# Altium PCB PCB1V1.2.PcbDoc (part 2 of 3)
Units mm, origin at the board's own origin, x right, y up, seen from the top; angles counter-clockwise.
Board outline 74.8 x 89.66 mm, 2 copper layers (Top Layer, Bottom Layer); 292 components, 184 nets, 916 pads, 196 vias.
Unrouted connection lines stored in the file: 106.
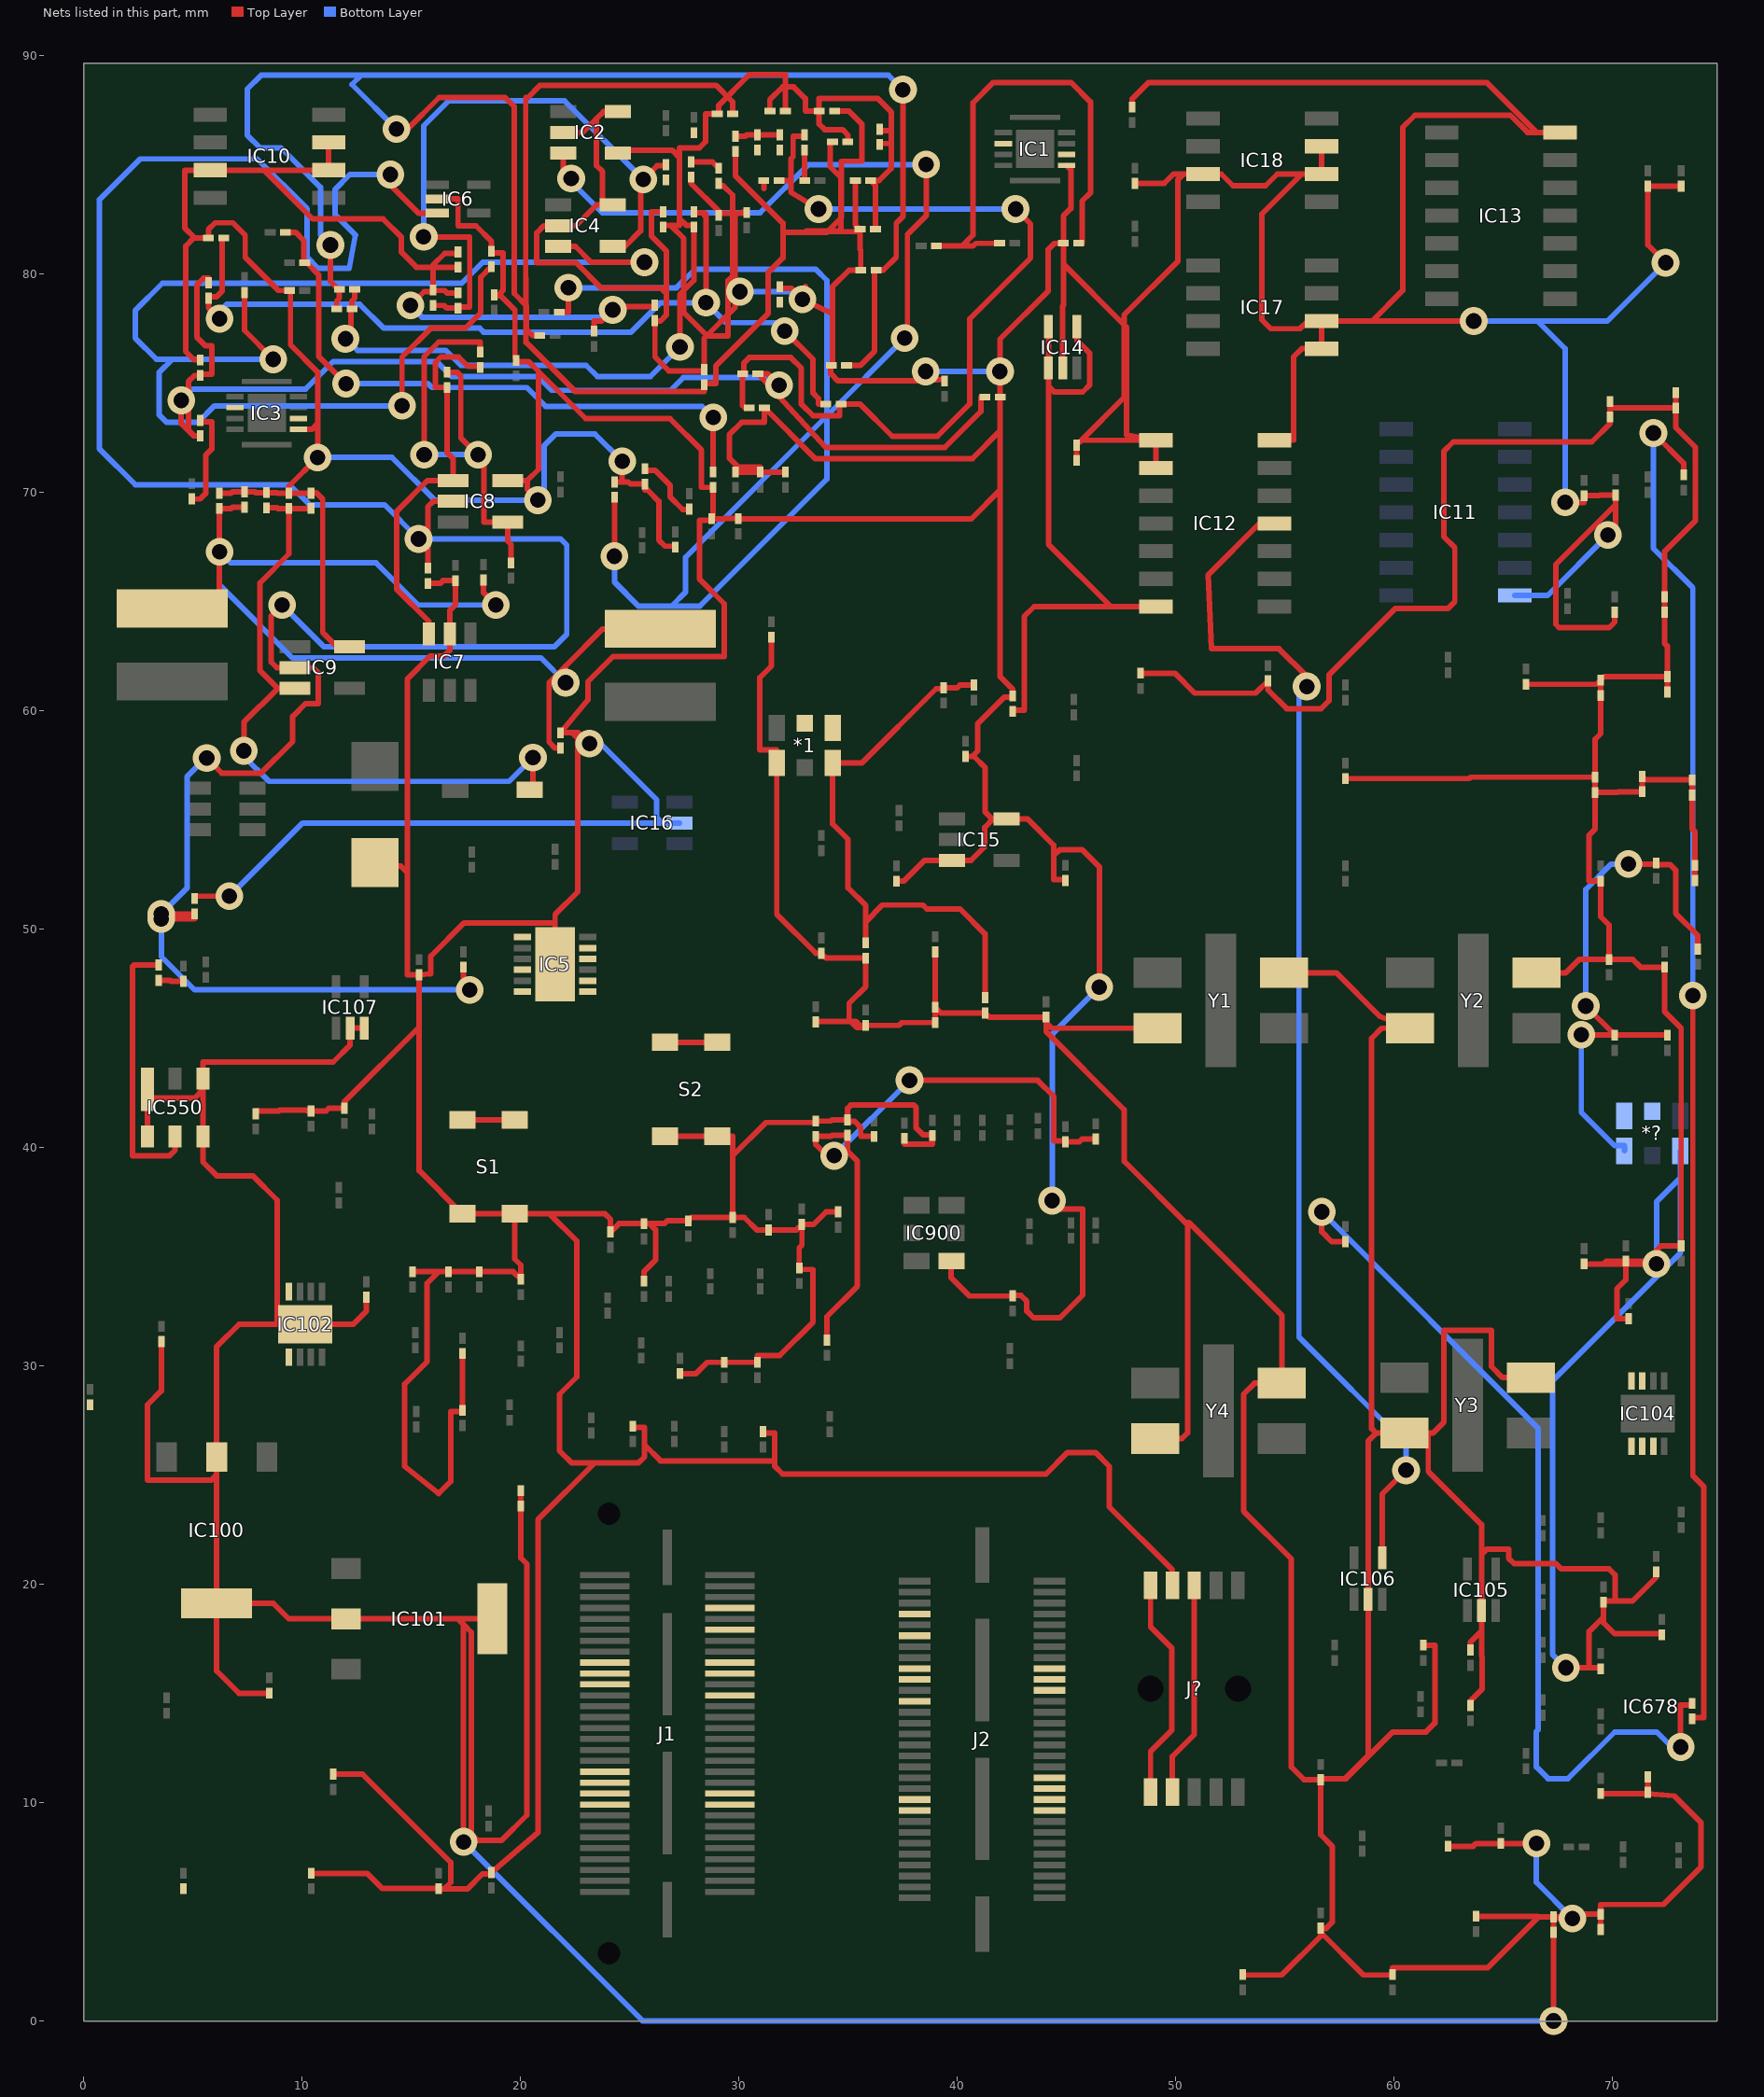
[diagram p2: the nets of this part, all layers, seen from the top]

## Via types
v1: diameter 1.27, hole 0.711, Top Layer to Bottom Layer, 196 vias

## Nets (pads, with @x,y where several pads share a name; then routed paths per layer and width w, separated by ;. In a path a pad name is that pad's centre, name@x,y a point inside that pad or via, vN(x,y) a via of type N, cw(c..) or ccw(c..) an arc to the next point about the centre after c; other vN are vias at no path point) (continued)
3.0V_2: *1.3 *?.3 C101.2 C102.1 C103.1 C104.1 C105.1 C106.1 C107.1 C108.1 C109.1 C109.2 C110.1 C112.1 C112.2 C113.1 C117.1 C118.1 C118.2 C119.1 C119.2 C120.1 C122.1 C123.1 C124.1 C125.1 C126.1 C126.2 C127.1 C127.2 C128.1 C128.2 C131.1 C131.2 C132.1 C134.1 C135.2 C136.1 C137.2 C138.2 C212.2 IC100.2 IC100.4 IC101.2 IC101.4 IC102.9 IC104.2 IC104.3 IC104.7 IC105.2 IC106.2 IC107.2 IC107.3 IC550.1 IC550.3 IC550.4 IC550.6 IC678.3 L100.1 L101.1 L101.2 L102.1 L103.1 L103.2 L104.1 L104.2 L109.1 L110.2 L111.1 L113.1 R104.1 R107.1 R107.2 R111.1 R112.1 R114.1 R115.1 R116.1 R116.2 R117.2 R118.1 R118.2 R119.2 R123.2 Y1.1 Y1.4 Y2.1 Y2.4 Y3.1 Y3.4 Y4.1 Y4.4 | length 580.3
  Top Layer w0.254: IC550.6@2.921,40.513 2.921,41.58 ; 2.922,41.581 IC550.1@2.922,42.266 ; IC550.1@2.922,42.663 IC550.1@2.922,42.266 ; C106.1@3.556,31.115 3.556,28.854 2.921,28.219 2.921,24.765 5.842,24.765 6.096,25.019 ; C108.1@8.509,15.017 8.509,15.011 7.112,15.011 6.096,16.027 IC100.4@6.096,19.129 ; IC107.3@12.857,45.466 IC107.2@12.207,45.466 12.207,44.694 11.43,43.917 5.461,43.917 IC550.3@5.461,43.163 5.461,42.647 ; C120.1@12.954,33.147 12.954,32.512 12.343,31.901 IC102.9@10.156,31.901 8.865,31.901 ; v1(17.399,8.204) 17.399,18.161 ; IC101.4@18.717,18.415 17.145,18.415 ; R107.2@20.018,24.282 R107.1@20.018,23.582 20.018,21.206 20.295,20.93 20.295,9.423 19.152,8.28 18.034,8.28 17.755,8.56 17.755,17.805 17.399,18.161 ; C105.1@31.496,63.373 31.496,62.052 30.963,61.519 30.963,58.217 31.739,58.217 *1.3@31.739,57.614 31.739,50.684 33.528,48.895 C102.1@33.782,48.895 34.005,48.672 C104.1@35.814,48.672 35.814,47.371 35.052,46.609 35.052,45.847 35.13,45.769 ; L100.1@33.528,45.751 33.528,45.769 35.13,45.769 ; C103.1@38.989,48.957 C112.2@38.989,46.42 ; C101.2@48.387,61.722 49.962,61.722 50.876,60.808 53.665,60.808 C107.1@54.229,61.372 54.229,60.96 55.093,60.096 56.667,60.096 57.023,60.452 57.023,61.646 60.071,64.694 62.484,64.694 62.789,64.999 62.789,67.468 62.281,67.976 62.281,71.882 62.713,72.314 69.06,72.314 69.898,73.152 L101.1@69.898,73.46 69.898,73.866 ; Y4.1@49.064,26.67 50.292,26.67 50.546,26.924 50.546,36.474 ; Y1.1@49.17,45.465 44.324,45.465 44.069,45.72 ; R117.2@53.082,2.128 53.082,2.108 54.864,2.108 56.642,3.886 C136.1@56.642,4.064 ; Y1.4@54.97,48.005 57.355,48.005 59.361,46 Y2.1@60.727,45.465 59.436,45.465 58.979,45.008 58.979,27.126 59.182,26.923 ; C136.1@56.642,4.253 C136.1@56.642,4.242 ; C110.1@57.785,56.896 63.449,56.895 63.515,56.961 C128.2@69.215,56.961 ; C138.2@61.341,17.21 61.874,17.21 61.874,13.64 61.468,13.233 59.944,13.233 57.81,11.1 57.76,11.1 ; C122.1@62.484,8.001 63.627,8.001 63.754,8.128 C125.1@64.897,8.128 v1(66.523,8.128) ; C137.2@63.5,14.447 63.5,14.656 64.033,15.189 64.033,16.688 64.008,16.713 64.008,17.856 ; R123.2@63.5,16.987 63.5,17.348 64.008,17.856 ; R119.2@63.754,4.795 66.582,4.795 66.613,4.764 ; C117.1@66.04,61.214 69.277,61.214 C127.2@69.469,61.406 ; Y3.4@66.273,29.463 64.974,29.463 64.465,29.972 64.465,31.624 62.292,31.624 62.292,27.432 61.783,26.923 Y3.1@61.571,26.923 ; Y2.4@66.527,48.005 67.869,48.005 68.474,48.61 C212.2@69.85,48.61 ; v1(67.31,0) R118.1@67.31,4.064 R118.2@67.31,4.699 ; v1(67.869,16.18) 68.936,16.18 ; v1(68.174,4.699) R118.2@67.31,4.699 ; C123.1@68.707,34.671 69.596,34.671 ; R116.1@69.469,4.191 R116.2@69.469,4.891 ; R114.1@69.469,16.129 69.469,16.18 68.936,16.18 ; L101.2@69.898,74.16 69.898,73.866 ; R111.1@70.739,32.162 70.739,32.156 70.206,32.156 70.206,33.528 70.612,33.934 L109.1@70.612,34.671 ; C119.2@71.374,56.992 C119.2@71.453,56.913 ; C131.2@71.628,11.176 C131.1@71.628,10.476 C131.1@71.628,10.409 ; R112.1@72.009,20.574 72.009,20.32 70.917,19.228 70.129,19.228 ; v1(72.023,34.671) L109.1@70.612,34.671 ; L113.1@72.263,17.684 72.263,17.729 70.104,17.729 69.596,18.237 69.596,18.503 ; C126.1@72.517,60.864 C126.2@72.517,61.564 ; C109.2@72.898,74.566 C109.1@72.898,73.866 ; C118.1@73.787,52.228 C118.2@73.787,52.928 73.787,54.458 73.66,54.585 L103.1@73.66,56.134 L103.2@73.66,56.834 71.532,56.834 C119.2@71.453,56.913 ; IC550.1@2.922,42.266 5.08,42.266 5.461,42.647 ; 5.461,42.647 IC550.4@5.461,40.513 5.461,39.345 6.096,38.71 7.747,38.71 8.865,37.592 8.865,31.901 ; IC100.4@6.096,19.129 6.096,25.019 ; IC100.4@6.096,19.129 8.687,19.129 9.401,18.415 IC101.2@12.017,18.415 17.145,18.415 ; 6.096,25.019 IC100.2@6.096,25.829 6.096,30.885 7.112,31.901 8.865,31.901 ; 17.145,18.415 17.399,18.161 ; 35.13,45.769 35.365,45.769 35.542,45.593 L102.1@35.814,45.593 ; 35.13,45.769 35.41,45.489 35.814,45.489 L102.1@35.814,45.593 ; L102.1@35.814,45.593 37.338,45.593 37.465,45.72 C112.1@38.989,45.72 C112.2@38.989,46.42 ; C112.2@38.989,46.42 39.246,46.163 R104.1@41.275,46.163 41.464,45.974 L111.1@44.069,45.974 44.069,45.72 ; 44.069,45.72 44.069,45.314 47.65,41.732 47.65,39.37 50.546,36.474 ; 50.546,36.474 50.546,36.576 50.606,36.576 54.864,32.318 Y4.4@54.864,29.21 53.619,29.21 53.111,28.702 53.111,23.35 55.296,21.165 55.296,11.633 55.88,11.049 C134.1@56.642,11.049 ; C136.1@56.642,4.064 C136.1@56.642,4.242 ; C136.1@56.642,4.064 58.598,2.108 59.94,2.108 C135.2@59.94,2.128 59.94,2.434 64.283,2.434 66.613,4.764 ; C136.1@56.642,4.242 56.896,4.242 57.175,4.521 57.175,8.001 56.642,8.534 C134.1@56.642,11.049 ; C134.1@56.642,11.049 56.642,11.1 57.76,11.1 ; 57.76,11.1 58.816,12.156 IC106.2@58.816,19.304 58.816,26.557 59.182,26.923 ; 59.182,26.923 Y3.1@60.473,26.923 Y3.1@61.571,26.923 ; Y3.1@61.571,26.923 61.571,25.17 64.008,22.733 64.008,21.361 ; 64.008,17.856 IC105.2@64.008,18.796 64.008,21.361 ; 64.008,21.361 64.262,21.615 65.253,21.615 65.253,21.195 65.507,20.941 67.425,20.941 67.666,20.701 69.85,20.701 70.129,20.422 70.129,19.228 ; 66.613,4.764 R118.2@67.31,4.764 ; R118.2@67.31,4.699 R118.2@67.31,4.764 ; R118.2@67.31,4.764 68.326,4.764 68.453,4.891 R116.2@69.469,4.891 ; 68.936,16.18 68.936,17.842 69.596,18.503 ; C128.1@69.215,56.261 69.215,54.585 68.936,54.305 68.936,52.197 C124.1@69.469,52.197 69.469,50.571 69.85,50.19 C212.2@69.85,48.61 ; C128.1@69.215,56.261 C128.2@69.215,56.961 ; C128.1@69.215,56.261 70.256,56.261 70.287,56.292 C119.1@71.374,56.292 71.374,56.834 C119.2@71.453,56.913 ; C128.2@69.215,56.961 69.215,58.699 69.469,58.953 C127.1@69.469,60.706 C127.2@69.469,61.406 ; R116.2@69.469,4.891 69.469,5.334 72.339,5.334 74.064,7.059 74.064,9.078 72.83,10.312 C131.1@71.628,10.409 ; C127.2@69.469,61.406 69.627,61.564 C126.2@72.517,61.564 ; 69.596,18.503 C132.1@69.596,19.177 69.596,19.228 70.129,19.228 ; 69.596,34.671 L109.1@70.612,34.671 ; 69.596,34.671 69.723,34.798 L109.1@70.612,34.798 ; C212.2@69.85,48.61 70.942,48.61 71.292,48.26 C113.1@72.39,48.26 72.39,46.232 73.152,45.47 L110.2@73.152,35.498 72.226,35.498 71.526,34.798 L109.1@70.612,34.798 ; 69.898,73.866 C109.1@72.898,73.866 ; L109.1@70.612,34.671 L109.1@70.612,34.798 ; C131.1@71.628,10.409 R115.1@69.469,10.414 69.469,10.409 C131.1@71.628,10.409 ; C126.2@72.517,61.564 72.517,62.967 72.39,63.094 L104.1@72.39,64.516 L104.2@72.39,65.216 72.39,67.285 73.812,68.707 73.812,72.06 72.898,72.974 C109.1@72.898,73.866
  Bottom Layer w0.254: v1(17.399,8.204) 25.603,0 v1(67.31,0) ; v1(66.523,8.128) 66.523,6.35 v1(68.174,4.699) ; v1(67.869,16.18) 67.259,16.789 67.259,29.312 73.115,35.168 73.115,38.608 ; v1(72.023,34.671) 72.023,37.516 73.115,38.608 ; *?.3@73.115,39.846 73.115,38.608
3.0V_3: C211.1 C213.1 L202.2 R206.1 R208.1 | length 28.9
  Top Layer w0.254: L202.2@34.036,31.18 34.036,32.258 35.433,33.655 35.433,39.37 34.986,39.817 C211.1@34.986,40.563 34.264,40.563 34.214,40.513 C213.1@33.528,40.513 33.528,40.132 34.036,39.624 v1(34.366,39.624) ; v1(37.821,43.078) 43.688,43.078 44.425,42.342 44.425,40.31 44.958,40.31 R208.1@44.958,40.259 45.593,40.259 45.72,40.386 R206.1@46.355,40.386
  Bottom Layer w0.254: v1(34.366,39.624) v1(37.821,43.078)
3.0V_log: C59.1 IC12.14 IC14.1 IC14.4 IC14.5 | length 30.2
  Top Layer w0.254: C59.1@42.545,59.975 42.545,60.02 43.078,60.02 43.078,64.327 43.521,64.77 47.041,64.77 ; IC14.5@44.181,77.592 IC14.1@44.181,75.692 44.181,74.869 ; IC14.4@45.481,77.592 45.481,76.962 46.076,76.367 46.076,74.93 45.745,74.6 44.45,74.6 44.181,74.869 ; IC12.14@49.104,64.77 47.041,64.77 ; 44.181,74.869 44.181,67.63 47.041,64.77
-Z_CIC: J1.24 J2.24 J?.4 J?.5 | length 9.9
  Top Layer w0.254: J?.4@49.857,10.488 49.857,12.116 50.857,13.116 J?.5@50.857,19.948
-Z_DEPLOY_SW_1: J1.17 J2.17 S1.1 S1.2 | length 2.4
  Top Layer w0.254: S1.1@17.342,41.266 S1.2@19.742,41.266
-Z_DEPLOY_SW_2: J1.18 J2.18 S2.1 S2.2 | length 2.4
  Top Layer w0.254: S2.1@26.613,44.822 S2.2@29.013,44.822
-Z_THERMISTOR: J1.22 J2.22 J?.1 J?.2 | length 10.3
  Top Layer w0.254: J?.2@48.857,10.488 48.857,12.344 49.835,13.322 49.835,17.069 48.857,18.047 J?.1@48.857,19.948
CMD_H/W_Bit_0: J1.40 J2.40
CMD_H/W_Bit_1: J1.41 J2.41
CMD_H/W_Bit_2: J1.42 J2.42
CMD_H/W_Bit_3: J1.43 J2.43 R30.1
CMD_H/W_BITS_STROBE: J1.44 J2.44
CMD_SERIAL_DATA: J1.49 J2.49
GND: C1.1 C2.1 C3.1 C4.1 C6.1 C8.1 C9.1 C14.2 C15.1 C16.1 C18.2 C19.2 C20.2 C21.2 C23.2 C27.2 C28.1 C29.1 C30.2 C34.2 C36.2 C37.2 C38.2 C39.2 C40.2 C41.2 C42.2 C43.1 C44.2 C45.2 C46.2 C47.2 C48.2 C49.2 C50.1 C52.2 C53.2 C54.1 C55.1 C56.1 C57.2 C58.1 C59.2 C60.2 C61.1 C62.1 C63.2 C64.2 C65.2 C66.2 C67.1 C68.2 C69.1 C201.1 C203.2 C204.1 C205.2 C206.2 C207.2 C208.2 C209.2 C210.2 C211.2 C213.2 C214.2 C651.1 D6.1 IC1.2 IC1.9 IC1.10 IC2.2 IC2.5 IC3.2 IC3.9 IC3.10 IC4.2 IC4.5 IC5.6 IC5.8 IC5.11 IC5.13 IC6.2 IC7.2 IC8.5 IC9.5 IC10.3 IC10.6 IC10.7 IC11.7 IC12.7 IC12.8 IC12.9 IC13.7 IC14.2 IC15.3 IC15.5 IC16.2 IC17.5 IC17.6 IC18.3 IC18.6 IC18.7 IC900.3 J?.3 L3.1 L7.1 L12.2 L14.1 R4.2 R9.2 R10.1 R12.1 R12.2 R19.2 R23.2 R24.1 R28.1 R29.1 R32.1 R33.1 R36.2 R40.2 R42.1 R201.1 R202.2 R205.1 R212.2 R221.1 R223.1 R653.2 S1.3 S1.4 S2.3 S2.4 | length 735.3
  Top Layer w0.254: C34.2@5.08,51.404 5.08,51.511 v1(6.68,51.511) ; C23.2@5.334,76.059 5.334,76.073 5.055,76.073 4.674,76.454 4.674,81.28 5.055,81.661 5.08,81.661 ; C38.2@6.223,69.963 6.756,69.963 6.818,70.025 C39.2@7.366,70.025 7.849,70.025 7.88,69.994 C44.2@8.382,69.994 8.865,69.994 8.896,69.963 C45.2@9.398,69.963 ; R19.2@7.878,41.546 7.878,41.673 8.939,41.673 8.98,41.714 10.204,41.714 10.245,41.673 C36.2@10.414,41.673 11.1,41.673 11.227,41.8 C37.2@11.938,41.8 11.938,42.088 15.367,45.517 ; IC3.9@9.836,72.884 10.451,72.884 10.719,73.152 ; C53.2@10.418,6.762 12.979,6.762 13.679,6.062 R29.1@16.26,6.062 16.26,6.045 16.51,6.045 ; IC10.7@11.221,86.027 IC10.6@11.221,84.757 8.258,84.757 ; C60.2@11.43,11.303 12.776,11.303 16.815,7.264 16.815,6.35 16.51,6.045 ; IC9.5@12.172,62.926 11.608,62.926 10.947,63.586 10.947,69.698 10.668,69.977 10.414,69.977 R23.2@10.414,69.963 C45.2@9.398,69.963 ; D6.1@13.335,53.045 13.335,52.883 14.529,52.883 14.834,52.578 ; C214.2@15.065,34.315 16.256,34.315 ; C43.1@15.761,65.834 16.332,65.834 16.459,65.961 R24.1@17.031,65.961 17.031,64.859 16.764,64.592 IC7.2@16.764,63.53 16.764,62.763 16.51,62.509 15.875,62.509 14.834,61.468 14.834,52.578 ; IC6.2@16.195,83.439 17.145,83.439 17.145,82.208 17.97,82.208 18.669,81.509 C30.2@18.669,81.043 18.669,80.975 19.202,80.975 19.202,79.248 18.948,78.994 ; C28.1@17.145,80.312 17.145,80.315 15.24,80.315 14.554,81.001 14.554,81.686 13.716,82.525 10.49,82.525 8.258,84.757 ; R223.1@17.351,30.567 C208.2@17.351,27.965 17.351,27.915 16.815,27.915 16.815,24.714 16.256,24.155 14.707,25.4 14.707,29.174 15.723,30.19 15.723,33.782 16.256,34.315 ; R653.2@18.796,79.042 18.796,78.994 18.948,78.994 ; IC8.5@19.424,70.546 20.32,70.546 ; v1(20.803,69.647) 20.32,70.129 20.32,70.546 ; IC5.13@21.59,48.387 21.59,50.292 ; C41.2@21.844,58.993 C41.2@21.844,59.004 ; IC2.2@21.971,86.487 22.855,86.487 23.49,87.122 ; v1(23.165,58.496) 22.657,59.004 22.352,59.004 ; IC4.5@24.237,83.167 IC4.5@23.764,83.167 ; C18.2@24.305,70.479 24.663,70.479 ; IC2.5@24.471,87.437 23.805,87.437 23.49,87.122 ; v1(24.663,71.425) 24.663,70.479 ; C207.2@25.146,27.243 25.146,27.178 25.679,27.178 25.679,26.391 ; C210.2@25.654,33.878 25.654,34.315 26.187,34.849 26.187,36.235 25.908,36.514 ; C29.1@26.162,77.874 C29.1@26.162,77.851 ; C20.2@26.543,82.852 26.01,82.852 26.01,81.734 26.695,81.048 26.695,79.096 ; S2.3@26.613,40.522 S2.4@29.013,40.522 29.718,40.522 29.718,39.624 ; R28.1@27.099,67.493 27.099,67.539 26.619,67.539 26.34,67.818 26.34,69.596 25.832,70.104 25.702,70.104 C50.1@25.702,70.383 25.039,70.383 24.943,70.479 24.663,70.479 ; C204.1@27.305,29.648 28.042,29.648 28.558,30.164 C205.2@29.337,30.164 C206.2@30.861,30.164 30.861,30.48 31.877,30.48 33.401,32.004 33.401,34.417 32.766,34.417 C66.2@32.766,34.482 32.766,35.408 32.893,35.535 C67.1@32.893,36.48 ; L14.1@27.813,84.438 27.813,84.15 29.083,82.88 C48.2@29.083,82.779 ; C48.2@29.083,82.694 C48.2@29.083,82.779 ; C47.2@29.845,70.931 C46.2@30.988,70.931 ; v1(30.048,79.197) v1@29.82,79.426 ; C49.2@30.353,82.821 30.141,82.821 30.099,82.779 29.82,82.779 ; C16.1@30.861,85.702 C16.1@30.884,85.725 ; R212.2@31.115,26.989 31.115,26.924 31.648,26.924 31.648,25.654 ; 31.146,83.923 C9.1@31.146,84.28 ; R10.1@31.854,85.725 31.877,85.702 R10.1@31.877,85.677 ; C27.2@31.873,79.418 31.873,79.35 32.41,79.35 v1(32.918,78.842) ; C14.2@32.131,70.931 C46.2@30.988,70.931 ; v1@33.045,79.426 32.918,79.299 v1(32.918,78.842) ; C6.1@34.29,86.058 34.188,86.058 34.188,84.912 34.671,84.43 34.671,81.963 33.106,81.963 33.129,81.94 34.671,81.94 L3.1@35.509,81.94 ; R40.2@34.544,37.053 33.999,37.053 33.426,36.48 C67.1@32.893,36.48 ; C4.1@35.337,84.28 35.337,82.247 35.516,82.068 L3.1@35.556,82.068 35.556,81.94 35.556,81.133 35.587,81.102 C2.1@35.587,80.18 35.052,80.18 34.29,79.418 34.29,78.181 ; C201.1@36.195,40.513 35.585,40.513 35.585,40.919 35.306,41.199 34.986,41.199 C211.2@34.986,41.263 ; C58.1@37.211,52.197 37.557,52.197 38.512,53.152 IC15.3@39.771,53.152 40.64,53.152 41.26,53.772 41.26,54.656 41.656,55.052 ; R202.2@37.592,40.417 37.592,40.157 38.862,40.157 R201.1@38.862,40.544 38.862,40.589 38.43,40.589 38.125,40.894 38.125,41.834 38.019,41.941 35.133,41.941 34.986,41.793 C211.2@34.986,41.263 ; v1(38.557,75.54) v1@38.557,75.108 ; L12.2@39.418,75.097 39.418,75.184 39.41,75.183 38.595,75.111 v1@38.557,75.108 ; IC900.3@39.74,34.794 39.726,34.794 39.726,34.036 40.564,33.198 42.545,33.198 C203.2@42.545,33.212 42.545,33.223 42.926,33.223 43.192,32.958 43.192,32.512 43.496,32.207 44.704,32.207 45.745,33.249 45.745,37.176 44.739,37.176 v1(44.348,37.567) ; C61.1@40.386,57.912 40.692,57.912 ; R9.2@41.973,74.366 R9.2@41.961,74.366 ; IC14.2@44.831,75.692 44.831,78.537 44.862,78.568 44.862,80.462 ; R205.1@44.958,52.228 44.958,52.273 44.425,52.273 44.425,53.365 ; IC1.9@45.011,84.975 45.203,84.783 45.203,83.007 44.862,82.666 C1.1@44.862,81.407 ; R12.1@45.462,71.465 R12.2@45.462,72.165 45.687,72.39 ; v1(46.507,47.346) 46.507,52.857 45.72,53.645 44.704,53.645 44.425,53.365 ; C68.2@48.006,87.647 48.006,88.011 48.768,88.773 64.237,88.773 66.523,86.487 ; R42.1@48.133,84.153 49.479,84.153 49.908,84.582 50.368,84.582 ; IC12.9@49.104,71.12 IC12.8@49.104,72.39 ; J?.3@49.857,19.948 49.857,20.653 46.965,23.546 46.965,25.4 46.33,26.035 45.06,26.035 44.069,25.044 32.004,25.044 31.648,25.4 31.648,25.654 ; IC12.7@54.528,72.39 55.397,72.39 55.397,76.2 55.778,76.581 IC17.5@56.687,76.581 IC17.6@56.687,77.851 ; IC18.7@56.687,85.852 IC18.6@56.687,84.582 55.778,84.582 ; v1(63.652,77.851) 59.004,77.851 ; IC13.7@67.609,86.487 66.523,86.487 ; v1(67.843,69.545) 68.707,69.545 C54.1@68.707,69.85 69.393,69.85 69.424,69.881 C55.1@70.152,69.881 70.152,69.444 ; v1(69.799,68.047) 70.152,68.399 70.152,69.444 ; R32.1@70.104,64.516 70.104,64.059 69.85,63.805 67.564,63.805 67.412,63.957 67.412,66.703 70.152,69.444 ; v1(72.441,80.518) 71.628,81.331 C56.1@71.628,84.026 R33.1@73.152,84.026 ; 5.08,81.661 4.625,82.116 4.625,84.757 IC10.3@5.797,84.757 8.258,84.757 ; 5.08,81.661 C8.1@5.715,81.661 5.715,82.042 6.02,82.347 6.833,82.347 7.401,81.778 7.401,80.762 8.915,79.248 L7.1@9.429,79.248 9.474,79.248 9.474,76.759 10.719,75.514 10.719,73.152 ; C45.2@9.398,69.963 9.398,70.282 v1(10.719,71.603) 10.719,73.152 ; 14.834,52.578 14.834,47.904 C651.1@15.367,47.904 ; 15.367,45.517 C651.1@15.367,47.904 ; 15.367,45.517 15.367,38.941 S1.3@17.342,36.966 S1.4@19.742,36.966 ; C651.1@15.367,47.904 C651.1@15.367,47.91 15.9,47.955 15.9,48.768 17.424,50.292 21.59,50.292 ; 16.256,34.315 R36.2@16.716,34.315 C57.2@18.113,34.315 19.668,34.315 R221.1@20.018,33.965 20.018,34.62 19.742,34.896 S1.4@19.742,36.966 ; 16.51,6.045 17.577,6.045 18.263,6.731 18.669,6.731 C52.2@18.669,6.796 20.803,8.636 20.803,22.962 23.393,25.552 ; 18.948,78.994 19.115,78.994 19.751,78.358 19.751,76.19 19.812,76.19 C19.2@19.812,76.042 19.812,75.997 20.371,75.997 20.828,75.54 ; S1.4@19.742,36.966 21.336,36.966 ; 20.32,70.546 20.828,71.054 20.828,75.54 ; 20.828,75.54 22.987,73.381 26.848,73.381 28.296,71.933 28.296,70.231 C15.1@28.829,70.231 28.829,68.88 28.75,68.801 C42.2@28.75,68.797 ; 21.336,36.966 23.876,36.966 24.13,36.712 C209.2@24.13,36.133 24.511,36.514 C65.2@25.654,36.514 25.908,36.514 ; 21.336,36.966 22.581,35.721 22.581,29.489 21.793,28.702 21.793,26.111 22.352,25.552 23.393,25.552 ; 21.59,50.292 21.59,50.673 22.631,51.714 22.631,58.725 22.352,59.004 ; C41.2@21.844,59.004 22.352,59.004 ; C41.2@21.844,59.004 23.089,60.503 23.089,61.328 24.245,62.484 29.337,62.484 29.337,64.897 28.194,66.04 28.194,68.732 28.75,68.732 C42.2@28.75,68.797 ; 23.393,25.552 25.4,25.552 25.679,25.832 25.679,26.391 ; 23.49,87.122 23.49,84.965 23.764,84.691 IC4.5@23.764,83.167 ; IC4.5@23.764,83.167 23.49,83.167 22.54,82.217 IC4.2@21.737,82.217 21.082,82.217 20.752,81.887 20.752,80.524 22.542,80.524 23.691,79.375 26.416,79.375 26.695,79.096 ; 25.679,26.391 26.416,25.654 31.648,25.654 ; 25.908,36.514 26.594,36.514 26.721,36.641 C64.2@27.686,36.641 27.844,36.799 C63.2@29.718,36.799 ; C29.1@26.162,77.851 26.162,76.2 26.797,75.565 28.417,75.565 C21.2@28.417,75.63 28.417,77.058 29.82,78.461 v1@29.82,79.426 ; C29.1@26.162,77.851 26.416,77.851 26.695,78.13 26.695,79.096 ; C42.2@28.75,68.797 29.337,68.797 29.343,68.803 C40.2@29.972,68.803 29.972,68.783 40.64,68.783 41.961,70.104 ; C48.2@29.083,82.779 29.82,82.779 ; C63.2@29.718,36.799 29.718,39.624 ; C63.2@29.718,36.799 30.251,36.799 30.824,36.226 C69.1@31.369,36.226 32.639,36.226 C67.1@32.893,36.48 ; 29.718,39.624 31.242,41.148 33.528,41.148 C213.2@33.528,41.213 34.214,41.213 34.264,41.263 C211.2@34.986,41.263 ; v1@29.82,79.426 29.82,82.779 ; C46.2@30.988,70.931 30.988,71.171 29.972,71.171 29.566,71.577 29.566,72.644 30.124,73.203 31.174,73.203 R4.2@31.174,73.878 33.498,71.554 40.702,71.554 41.961,72.813 ; v1(32.918,78.842) 34.29,78.181 ; 34.29,78.181 34.29,75.814 C3.1@34.238,75.814 34.214,75.814 34.214,75.438 34.544,75.108 v1@38.557,75.108 ; 40.692,57.912 40.767,57.912 41.275,57.404 41.275,55.372 41.595,55.052 41.656,55.052 ; 40.692,57.912 40.946,58.166 40.946,59.412 42.164,60.63 42.545,60.63 C59.2@42.545,60.675 42.545,60.985 41.961,61.57 41.961,70.104 ; 41.656,55.052 IC15.5@42.271,55.052 43.221,55.052 44.425,53.848 44.425,53.365 ; 41.961,70.104 41.961,72.813 ; 41.961,72.813 R9.2@41.961,74.366 ; R9.2@41.961,74.366 v1(41.961,75.54) 41.961,77.013 44.171,79.223 44.171,81.128 44.45,81.407 C1.1@44.862,81.407 ; 44.862,80.462 C1.1@44.862,81.407 ; 44.862,80.462 47.65,77.673 ; 45.687,72.39 47.65,74.353 47.65,77.673 ; 45.687,72.39 IC12.8@49.104,72.39 ; 47.65,77.673 47.752,77.572 47.752,72.644 IC12.8@49.104,72.39 ; 47.65,77.673 47.65,78.13 50.114,80.594 50.114,84.328 50.368,84.582 ; 50.368,84.582 IC18.3@51.263,84.582 52.095,84.582 52.629,84.049 54.124,84.049 54.657,84.582 55.778,84.582 ; 55.778,84.582 53.95,82.753 53.95,77.902 54.356,77.495 55.696,77.495 56.052,77.851 IC17.6@56.687,77.851 ; IC17.6@56.687,77.851 59.004,77.851 ; 59.004,77.851 60.401,79.248 60.401,86.716 60.96,87.274 65.329,87.274 66.116,86.487 66.523,86.487
  Bottom Layer w0.254: v1(6.68,51.511) 10.033,54.864 26.492,54.864 ; v1(10.719,71.603) 14.122,71.603 16.078,69.647 v1(20.803,69.647) 21.082,69.926 21.082,72.136 21.615,72.669 23.419,72.669 v1(24.663,71.425) ; v1(23.165,58.496) 23.673,58.496 26.238,55.931 26.238,55.118 26.492,54.864 ; IC16.2@27.285,54.864 26.492,54.864 ; v1(30.048,79.197) 32.563,79.197 v1(32.918,78.842) ; v1(38.557,75.54) v1(41.961,75.54) ; v1(44.348,37.567) 44.348,45.187 v1(46.507,47.346) ; v1(63.652,77.851) 66.573,77.851 ; IC11.7@65.532,65.278 67.031,65.278 v1(69.799,68.047) ; v1(67.843,69.545) 67.843,76.581 66.573,77.851 ; v1(72.441,80.518) 69.774,77.851 66.573,77.851
I2C2_SCL: J1.19 J2.19
I2C2_SDA: J1.20 J2.20
ICR_RSSI: J1.37 J2.37
IF+: IC678.1 R103.2 R105.1 | length 62.9
  Top Layer w0.254: v1(71.882,72.72) 73.279,71.323 R103.2@73.279,70.804 ; R105.1@73.66,13.843 73.66,13.894 74.193,13.894 74.193,24.46 73.685,24.968 v1(73.685,46.965)
  Bottom Layer w0.254: v1(71.882,72.72) 71.882,67.437 73.685,65.634 v1(73.685,46.965)
IF-: IC678.2 R105.2 R106.1 | length 42.3
  Top Layer w0.254: v1(56.693,37.059) 56.693,36.144 57.15,35.687 R106.1@57.785,35.687 ; v1(73.127,12.548) 73.127,14.478 73.66,14.478 R105.2@73.66,14.543
  Bottom Layer w0.254: v1(56.693,37.059) 66.599,27.153 66.599,13.335 66.523,13.259 66.523,11.633 67.056,11.1 67.973,11.1 70.104,13.231 72.034,13.231 72.718,12.548 v1(73.127,12.548)
LT: IC12.4 IC106.4 | length 55.3
  Top Layer w0.254: IC12.4@54.528,68.58 53.848,68.58 51.486,66.218 51.637,62.84 54.736,62.84 56.007,61.57 v1(56.007,61.112) ; IC106.4@59.466,21.204 59.466,24.135 v1(60.554,25.222)
  Bottom Layer w0.254: v1(56.007,61.112) 55.651,60.757 55.651,31.318 60.554,26.416 v1(60.554,25.222)
MODEM_CXR_DET: J1.53 J2.53
Net*1_1: *1.1 C104.2 R100.2 R102.2 R104.2 | length 26.1
  Top Layer w0.254: *1.1@34.3,57.614 *1.1@34.3,57.607 ; C104.2@35.814,49.372 35.814,50.343 ; R100.2@40.767,61.183 40.132,61.183 40.005,61.056 R102.2@39.37,61.056 39.37,61.011 39.04,61.011 35.636,57.607 *1.1@34.3,57.607 ; R104.2@41.275,46.863 41.275,49.784 40.132,50.927 38.608,50.927 38.43,51.105 36.576,51.105 35.814,50.343 ; *1.1@34.3,57.607 34.3,54.813 35.001,54.112 35.001,51.892 35.814,51.079 35.814,50.343
Net*1_4: *1.4 IC102.1
Net*1_5: *1.5 IC102.8
Net*?_1: *?.1 C121.2 R108.2 R109.2 R110.2 | length 26.4
  Top Layer w0.254: v1(68.58,45.161) C121.2@70.104,45.161 ; v1(68.783,46.482) C121.2@70.104,45.161 ; v1(70.739,52.984) R108.2@72.009,52.984 ; R108.2@72.009,53.024 R108.2@72.009,52.984 ; R110.2@72.517,45.15 C121.2@70.104,45.15 C121.2@70.104,45.161 ; R109.2@73.914,49.087 73.914,49.708 72.898,50.724 72.898,52.705 72.644,52.959 72.009,52.959 R108.2@72.009,52.984
  Bottom Layer w0.254: v1(68.58,45.161) 68.58,41.605 70.104,40.081 70.554,40.081 *?.1@70.554,39.846 ; v1(68.783,46.482) 68.783,51.816 69.952,52.984 v1(70.739,52.984)
Net*?_4: *?.4 IC104.1
Net*?_5: *?.5 IC104.8
NetC1_2: C1.2 L1.1 R1.2 | length 22.6
  Top Layer w0.254: R1.2@39.054,81.28 40.216,81.28 ; L1.1@41.941,81.407 40.851,81.407 40.724,81.28 40.216,81.28 ; C1.2@45.562,81.407 45.72,81.407 45.72,83.337 46.101,83.718 46.101,87.884 45.212,88.773 41.656,88.773 40.724,87.841 40.724,81.788 40.216,81.28
NetC2_2: C2.2 C3.2 L4.2 R2.1 R3.1 | length 78.1
  Top Layer w0.254: v1(11.303,81.331) 11.303,79.663 11.67,79.296 R3.1@11.715,79.296 11.715,78.892 11.588,78.765 L4.2@11.588,78.407 ; v1(14.326,86.639) 14.834,86.639 16.281,88.087 19.304,88.087 19.721,87.671 19.721,79.107 20.269,78.558 20.269,77.47 20.554,77.185 R2.1@20.89,77.185 ; C3.2@34.938,75.814 35.56,75.814 36.22,76.474 36.22,80.18 C2.2@36.287,80.18 36.619,80.18 37.211,80.772 37.211,82.321 37.516,82.626 v1(37.516,88.443)
  Bottom Layer w0.254: v1(11.303,81.331) 10.846,81.788 10.846,83.972 9.042,85.776 8.077,85.776 7.493,86.36 7.493,88.468 8.128,89.103 12.7,89.103 ; v1(14.326,86.639) 12.281,88.684 12.7,89.103 ; v1(37.516,88.443) 36.855,89.103 12.7,89.103
NetC4_2: C4.2 C12.2 L3.2 | length 5.8
  Top Layer w0.254: L3.2@36.256,82.068 36.256,84.061 C4.2@36.037,84.28 36.426,84.28 36.982,84.836 36.982,86.563 36.449,86.563 C12.2@36.449,86.631
NetC6_2: C6.2 C12.1 L5.1 R6.1 | length 12.4
  Top Layer w0.254: R6.1@31.431,87.455 31.42,87.455 31.42,87.986 32.004,88.57 32.512,88.57 33.045,88.036 33.045,87.455 L5.1@33.68,87.455 ; L5.1@33.686,87.455 L5.1@33.68,87.455 ; C6.2@34.99,86.058 35.001,86.058 35.001,86.36 34.747,86.614 33.934,86.614 33.68,86.868 L5.1@33.68,87.455 ; C12.1@36.449,85.931 36.449,85.979 36.982,85.979 36.982,87.427 36.373,88.036 33.68,88.036 L5.1@33.68,87.455
NetC8_2: C8.2 C13.2 L6.1 L11.1 | length 41.7
  Top Layer w0.254: v1(6.223,77.953) 5.715,78.461 L11.1@5.715,78.898 5.715,78.967 6.096,78.967 6.35,79.221 6.35,81.661 C8.2@6.415,81.661 ; C13.2@27.94,82.852 27.94,82.804 28.321,82.804 ; v1(28.499,78.689) 28.499,82.626 ; v1(32.106,77.394) 33.401,76.098 33.401,74.549 33.655,74.295 33.655,74.041 L6.1@33.988,74.041 ; 28.321,82.804 28.423,82.804 28.499,82.728 28.499,82.626 ; 28.321,82.804 28.499,82.626
  Bottom Layer w0.254: v1(6.223,77.953) 6.223,78.283 6.553,78.613 12.649,78.613 13.741,77.521 18.136,77.521 18.313,77.343 25.07,77.343 26.416,78.689 v1(28.499,78.689) 29.413,77.775 31.725,77.775 v1(32.106,77.394)
NetC9_2: C9.2 C11.2 L6.2 R4.1 R7.1 | length 41.2
  Top Layer w0.254: R4.1@30.474,73.878 30.281,73.878 30.178,73.981 R7.1@30.178,75.438 30.226,75.438 30.226,75.921 30.48,76.175 32.385,76.175 32.868,75.692 32.868,74.041 33.401,73.508 34.62,73.508 34.62,74.041 L6.2@34.688,74.041 35.56,74.041 37.031,72.57 39.093,72.57 40.575,74.052 40.575,77.952 43.358,80.735 43.358,82.296 v1(42.674,82.979) ; C9.2@31.846,84.28 32.385,84.28 ; C11.2@33.02,86.377 33.02,86.309 32.487,86.309 32.487,85.369 32.385,85.268 32.385,84.28 ; v1(33.655,82.979) 32.385,83.744 32.385,84.28
  Bottom Layer w0.254: v1(33.655,82.979) v1(42.674,82.979)
NetC11_1: C11.1 L2.1 | length 1.4
  Top Layer w0.254: L2.1@33.02,84.28 C11.1@33.02,85.677
NetC13_1: C13.1 IC2.4 L4.1 R3.2 | length 31.5
  Top Layer w0.254: v1(11.989,77.038) 12.243,77.292 12.243,78.407 L4.1@12.288,78.407 12.288,78.765 12.415,78.892 R3.2@12.415,79.296 ; IC2.4@24.471,85.537 24.892,85.537 25.029,85.674 26.949,85.674 27.28,85.344 27.28,82.55 27.61,82.22 27.94,82.22 C13.1@27.94,82.152 27.94,79.705 27.305,79.07 v1(27.305,76.657)
  Bottom Layer w0.254: v1(11.989,77.038) 12.014,77.038 12.548,76.505 16.586,76.505 17.272,75.819 23.012,75.819 23.52,75.311 25.959,75.311 v1(27.305,76.657)
NetC15_2: C15.2 L8.1 R8.2 | length 28.4
  Top Layer w0.254: L8.1@9.24,81.915 9.703,81.915 10.084,81.534 10.084,80.518 R8.2@10.129,80.518 10.211,80.518 10.76,79.969 10.76,76.235 v1(12.014,74.981) ; C15.2@28.829,70.931 v1(28.829,73.431)
  Bottom Layer w0.254: v1(12.014,74.981) 15.773,74.981 15.951,74.803 20.295,74.803 21.158,73.939 28.321,73.939 v1(28.829,73.431)
NetC16_2: C16.2 L10.2 R10.2 | length 2.1
  Top Layer w0.254: L10.2@29.845,86.312 30.302,86.312 30.367,86.377 C16.2@30.861,86.377 R10.2@31.877,86.377
NetC17_1: C17.1 C20.1 L9.1 R6.2 | length 27.4
  Top Layer w0.254: C20.1@26.543,82.152 26.543,82.22 26.891,82.22 ; C17.1@29.083,84.153 29.083,84.049 29.286,84.049 29.718,83.617 29.718,79.908 29.515,79.705 29.515,77.165 28.55,77.165 27.483,78.232 27.483,81.628 26.891,82.22 ; R6.2@32.131,87.455 32.131,89.129 30.48,89.129 29.083,87.732 29.083,87.328 L9.1@29.018,87.328 28.473,87.328 28.473,86.055 28.194,85.776 27.28,85.776 27.28,82.22 26.891,82.22
NetC17_2: C17.2 C27.1 L14.2 | length 1.4
  Top Layer w0.254: L14.2@27.813,85.138 28.798,85.138 C17.2@29.083,84.853
NetC18_1: C18.1 IC2.3 R5.2 | length 86.6
  Top Layer w0.254: R5.2@21.782,78.249 22.2,78.249 v1(22.2,79.375) ; IC2.3@21.971,85.537 21.971,84.734 v1(22.327,84.379) ; v1(24.305,67.081) v1@24.305,67.084 ; C18.1@24.305,69.779 v1@24.305,67.084 ; v1(24.308,67.081) v1@24.305,67.084 ; v1(37.592,77.064) 37.723,77.195 37.723,81.813 38.583,82.673 v1(38.583,85.014)
  Bottom Layer w0.254: v1(22.2,79.375) 27.153,79.375 27.991,80.213 33.528,80.213 34.036,79.705 34.036,73.508 ; v1(22.327,84.379) 22.25,84.303 23.749,82.804 30.976,82.804 33.186,85.014 v1(38.583,85.014) ; v1(24.305,67.081) 24.305,65.89 25.4,64.795 25.425,64.795 ; v1(24.308,67.081) 24.308,65.913 25.425,64.795 ; v1(37.592,77.064) 34.036,73.508 ; 25.425,64.795 26.924,64.795 ; 26.924,64.795 28.219,64.795 34.036,70.612 34.036,73.508 ; 26.924,64.795 27.566,65.438 27.566,67.038 34.036,73.508
NetC21_1: C21.1 L5.2 L9.2 L10.1 | length 54.3
  Top Layer w0.254: L9.2@29.718,87.328 29.718,87.884 28.956,88.646 20.904,88.646 20.345,88.087 20.244,88.087 20.244,79.858 20.259,79.842 20.259,76.871 22.504,74.625 28.417,74.625 C21.1@28.417,74.93 28.417,74.981 28.956,74.981 28.956,75.803 31.339,78.186 31.339,80.056 32.024,80.741 32.024,81.915 ; L10.1@29.845,85.612 29.845,84.506 32.024,82.327 32.024,81.915 ; L5.2@34.386,87.455 35.052,87.455 35.636,86.871 35.636,85.166 34.696,85.166 34.696,82.575 34.036,81.915 32.024,81.915
NetC23_1: C23.1 C25.1 L11.2 R7.2 R9.1 | length 54.9
  Top Layer w0.254: v1(4.47,74.219) 4.47,73.152 5.029,72.593 5.08,72.593 ; C25.1@5.334,72.596 5.334,72.593 5.08,72.593 ; L11.2@5.715,79.598 5.715,79.807 5.486,79.807 5.182,79.502 5.182,77.114 5.588,76.708 5.867,76.708 5.867,75.413 5.334,75.413 C23.1@5.334,75.359 5.334,75.356 5.08,75.356 4.801,75.077 4.801,72.873 5.08,72.593 ; v1(31.852,74.905) 31.318,75.438 R7.2@30.878,75.438 31.59,74.664 33.983,72.062 39.444,72.062 41.083,73.701 41.083,74.366 R9.1@41.273,74.366
  Bottom Layer w0.254: v1(4.47,74.219) 4.978,74.727 10.16,74.727 11.43,75.997 16.167,75.997 16.853,75.311 20.803,75.311 21.438,74.676 26.88,74.676 27.464,75.26 31.496,75.26 v1(31.852,74.905)
NetC25_2: C25.2 L13.1 | length 4.7
  Top Layer w0.254: L13.1@4.953,69.706 4.953,69.698 5.334,69.698 5.588,69.952 5.588,71.704 5.867,71.984 5.867,73.228 5.334,73.228 C25.2@5.334,73.296
NetC28_2: C28.2 C29.2 L16.2 R13.2 R14.1 | length 19
  Top Layer w0.254: v1(14.961,78.562) 15.596,79.197 16.002,79.197 R14.1@16.002,79.248 ; L16.2@17.145,79.138 16.637,79.138 16.527,79.248 R14.1@16.002,79.248 ; C28.2@17.145,81.012 17.145,80.95 16.535,80.95 16.002,80.416 R14.1@16.002,79.265 R14.1@16.002,79.248 ; R13.2@23.368,77.383 23.368,77.851 23.724,77.851 v1@24.13,78.257 ; v1(24.232,78.359) v1@24.13,78.257 ; C29.2@26.162,78.574 26.162,78.511 23.876,78.511 v1@24.13,78.257
  Bottom Layer w0.254: v1(14.961,78.562) 15.494,78.029 23.901,78.029 v1(24.232,78.359)
NetC30_1: C30.1 IC4.3 R15.1 | length 63.4
  Top Layer w0.254: R15.1@7.366,79.152 7.366,77.419 v1(8.687,76.098) ; v1(14.58,73.965) 14.58,76.2 15.9,77.521 17.475,77.521 18.186,78.232 18.186,79.86 C30.1@18.669,80.343 ; IC4.3@21.737,81.267 22.517,81.267 23.241,80.543 v1(25.679,80.543)
  Bottom Layer w0.254: v1(8.687,76.098) 4.064,76.098 ; v1(14.58,73.965) 5.994,73.965 5.232,73.203 3.81,73.203 3.454,73.558 3.454,75.489 4.064,76.098 ; v1(25.679,80.543) 18.276,80.543 17.311,79.578 3.607,79.578 2.362,78.334 2.362,77.074 3.337,76.098 4.064,76.098
NetC31_1: C31.1 L15.1
NetC31_2: C31.2 IC4.4 L16.1 R14.2 | length 29.5
  Top Layer w0.254: v1(15.57,81.7) 17.678,81.7 17.678,78.486 17.145,78.486 L16.1@17.145,78.438 16.637,78.438 16.51,78.565 R14.2@16.002,78.565 ; IC4.4@24.237,81.267 24.79,81.267 25.502,81.978 25.502,84.201 v1(25.629,84.328) 26.264,84.963 26.67,84.963 C31.2@26.67,85.011
  Bottom Layer w0.254: v1(15.57,81.7) 15.57,86.782 16.723,87.935 22.022,87.935 v1(25.629,84.328)
NetC32_1: C32.1 L17.2 | length 1.2
  Top Layer w0.254: C32.1@3.429,47.656 3.962,47.656 4.01,47.608 L17.2@4.572,47.608
NetC32_2: C32.2 IC550.5 | length 12.6
  Top Layer w0.254: C32.2@3.429,48.356 3.429,48.362 2.311,48.362 2.235,48.285 2.235,39.624 3.935,39.624 4.189,39.878 IC550.5@4.189,40.513
NetC34_1: C34.1 C43.2 IC5.1 IC5.4 IC5.7 IC5.10 IC6.3 IC8.2 IC9.2 R17.1 | length 126
  Top Layer w0.254: v1(3.556,50.47) 5.08,50.47 C34.1@5.08,50.698 ; v1(3.556,50.698) C34.1@5.08,50.698 ; C34.1@5.08,50.704 C34.1@5.08,50.698 ; v1(5.639,57.836) 6.325,57.15 8.128,57.15 9.576,58.598 9.576,59.741 10.16,60.325 10.753,60.325 10.753,61.722 10.499,61.976 IC9.2@9.672,61.976 8.845,61.976 8.591,62.23 8.591,64.344 v1(9.093,64.846) ; v1(14.046,84.557) 14.046,84.074 15.331,82.789 IC6.3@16.195,82.789 ; v1(15.342,67.869) v1@15.761,67.449 ; C43.2@15.761,66.534 v1@15.761,67.449 ; IC8.2@16.924,69.596 16.015,69.596 15.761,69.342 v1@15.761,67.449 ; R17.1@17.399,48.26 17.399,47.498 v1(17.678,47.219)
  Bottom Layer w0.254: v1(3.556,50.47) 3.556,48.743 5.08,47.219 v1(17.678,47.219) ; v1(3.556,50.698) 4.75,51.892 4.75,56.998 5.588,57.836 v1(5.639,57.836) ; v1(9.093,64.846) 11.013,62.927 21.55,62.927 22.123,63.5 22.123,67.589 21.844,67.869 v1(15.342,67.869) 13.777,69.434 10.348,69.434 9.433,70.348 2.372,70.348 0.731,71.989 0.731,83.415 2.591,85.275 7.943,85.275 10.236,82.982 10.236,80.772 10.744,80.264 12.167,80.264 12.446,81.788 11.506,82.728 11.506,83.871 12.192,84.557 v1(14.046,84.557)
NetC38_1: C38.1 C39.1 C41.1 L18.2 L19.1 R20.1 | length 52.4
  Top Layer w0.254: L18.2@4.064,64.681 6.223,64.681 v1(6.223,67.285) C38.1@6.223,69.263 6.756,69.263 6.818,69.325 C39.1@7.366,69.325 ; R20.1@18.301,65.992 18.301,65.417 v1(18.872,64.846) ; C41.1@21.844,58.293 21.59,58.293 21.311,58.572 21.311,61.29 22.073,62.052 ; v1(22.073,61.29) 22.073,62.052 ; L19.1@26.416,63.754 23.774,63.754 22.073,62.052
  Bottom Layer w0.254: v1(18.872,64.846) 15.316,64.846 13.386,66.777 6.731,66.777 v1(6.223,67.285) 6.223,65.76 9.565,62.419 20.944,62.419 v1(22.073,61.29)
NetC44_1: C44.1 C45.1 D?.2 IC9.3 R23.1 | length 31.5
  Top Layer w0.254: v1(7.341,58.166) 7.341,59.487 8.89,61.026 ; C44.1@8.382,69.294 8.865,69.294 8.896,69.263 C45.1@9.398,69.263 ; IC9.3@9.672,61.026 8.89,61.026 ; R23.1@10.414,69.263 C45.1@9.398,69.263 ; D?.2@20.418,56.388 20.574,56.388 v1(20.574,57.861) ; 8.89,61.026 8.077,61.839 8.077,65.862 9.398,67.183 C45.1@9.398,69.263
  Bottom Layer w0.254: v1(7.341,58.166) 7.341,57.912 8.484,56.769 19.482,56.769 v1(20.574,57.861)
NetC50_2: C50.2 R26.1 | length 3.2
  Top Layer w0.254: C50.2@25.702,71.083 25.702,71.018 26.162,71.018 26.848,70.333 26.848,69.799 27.432,69.215 27.734,69.215 R26.1@27.734,69.24
NetC51_1: C51.1 IC7.3 IC8.1 R27.2 | length 17.8
  Top Layer w0.254: IC7.3@15.814,63.53 15.814,64.084 14.326,65.573 14.326,69.124 15.748,70.546 IC8.1@16.916,70.546 ; IC8.1@16.924,70.546 IC8.1@16.916,70.546 ; R27.2@18.161,75.723 18.161,75.768 17.602,75.768 17.17,76.2 16.358,76.2 16.104,75.946 16.104,74.803 C51.1@16.637,74.803 16.637,71.831 16.916,71.552 IC8.1@16.916,70.546
NetC51_2: C51.2 IC8.4 R22.2 R27.1 | length 21.5
  Top Layer w0.254: v1(15.596,71.73) 15.596,76.225 16.256,76.886 18.161,76.886 R27.1@18.161,76.423 ; C51.2@16.637,75.503 16.637,75.489 17.122,75.489 17.272,75.339 17.272,72.492 v1@18.339,71.425 ; v1(18.059,71.73) 18.339,71.45 v1@18.339,71.425 ; R22.2@19.571,66.771 19.571,67.615 19.424,67.762 IC8.4@19.424,68.646 18.339,68.646 v1@18.339,71.425
  Bottom Layer w0.254: v1(15.596,71.73) v1(18.059,71.73)